# Altium PCB PCB52.PcbDoc
Units mil, origin at the board's own origin, x right, y up, seen from the top; angles counter-clockwise.
Board outline 1390 x 1665 mil, 2 copper layers (Top Layer, Bottom Layer), stack 21 mil thick; 22 components, 15 nets, 85 pads, 10 vias.
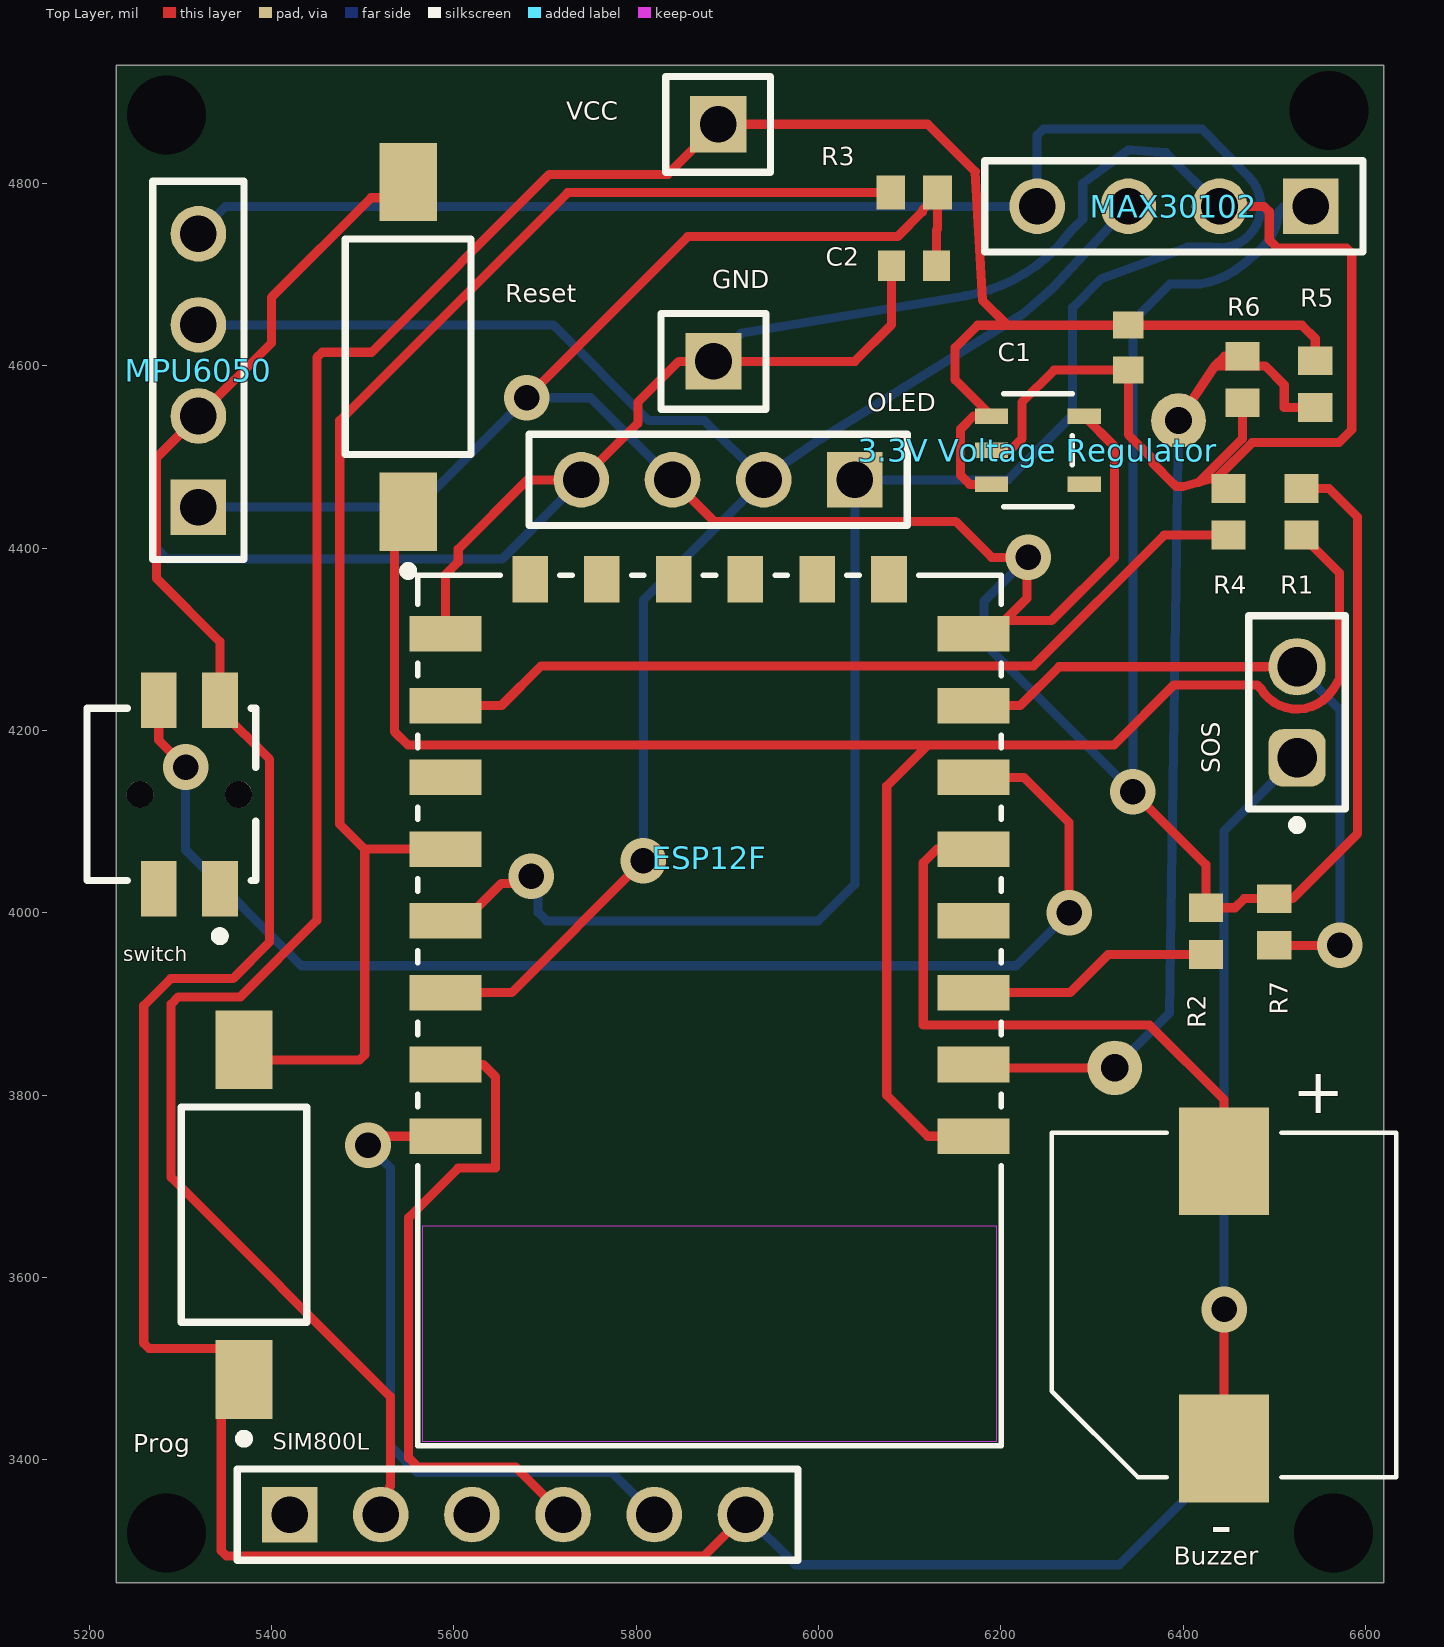
[diagram p0: Top Layer view]
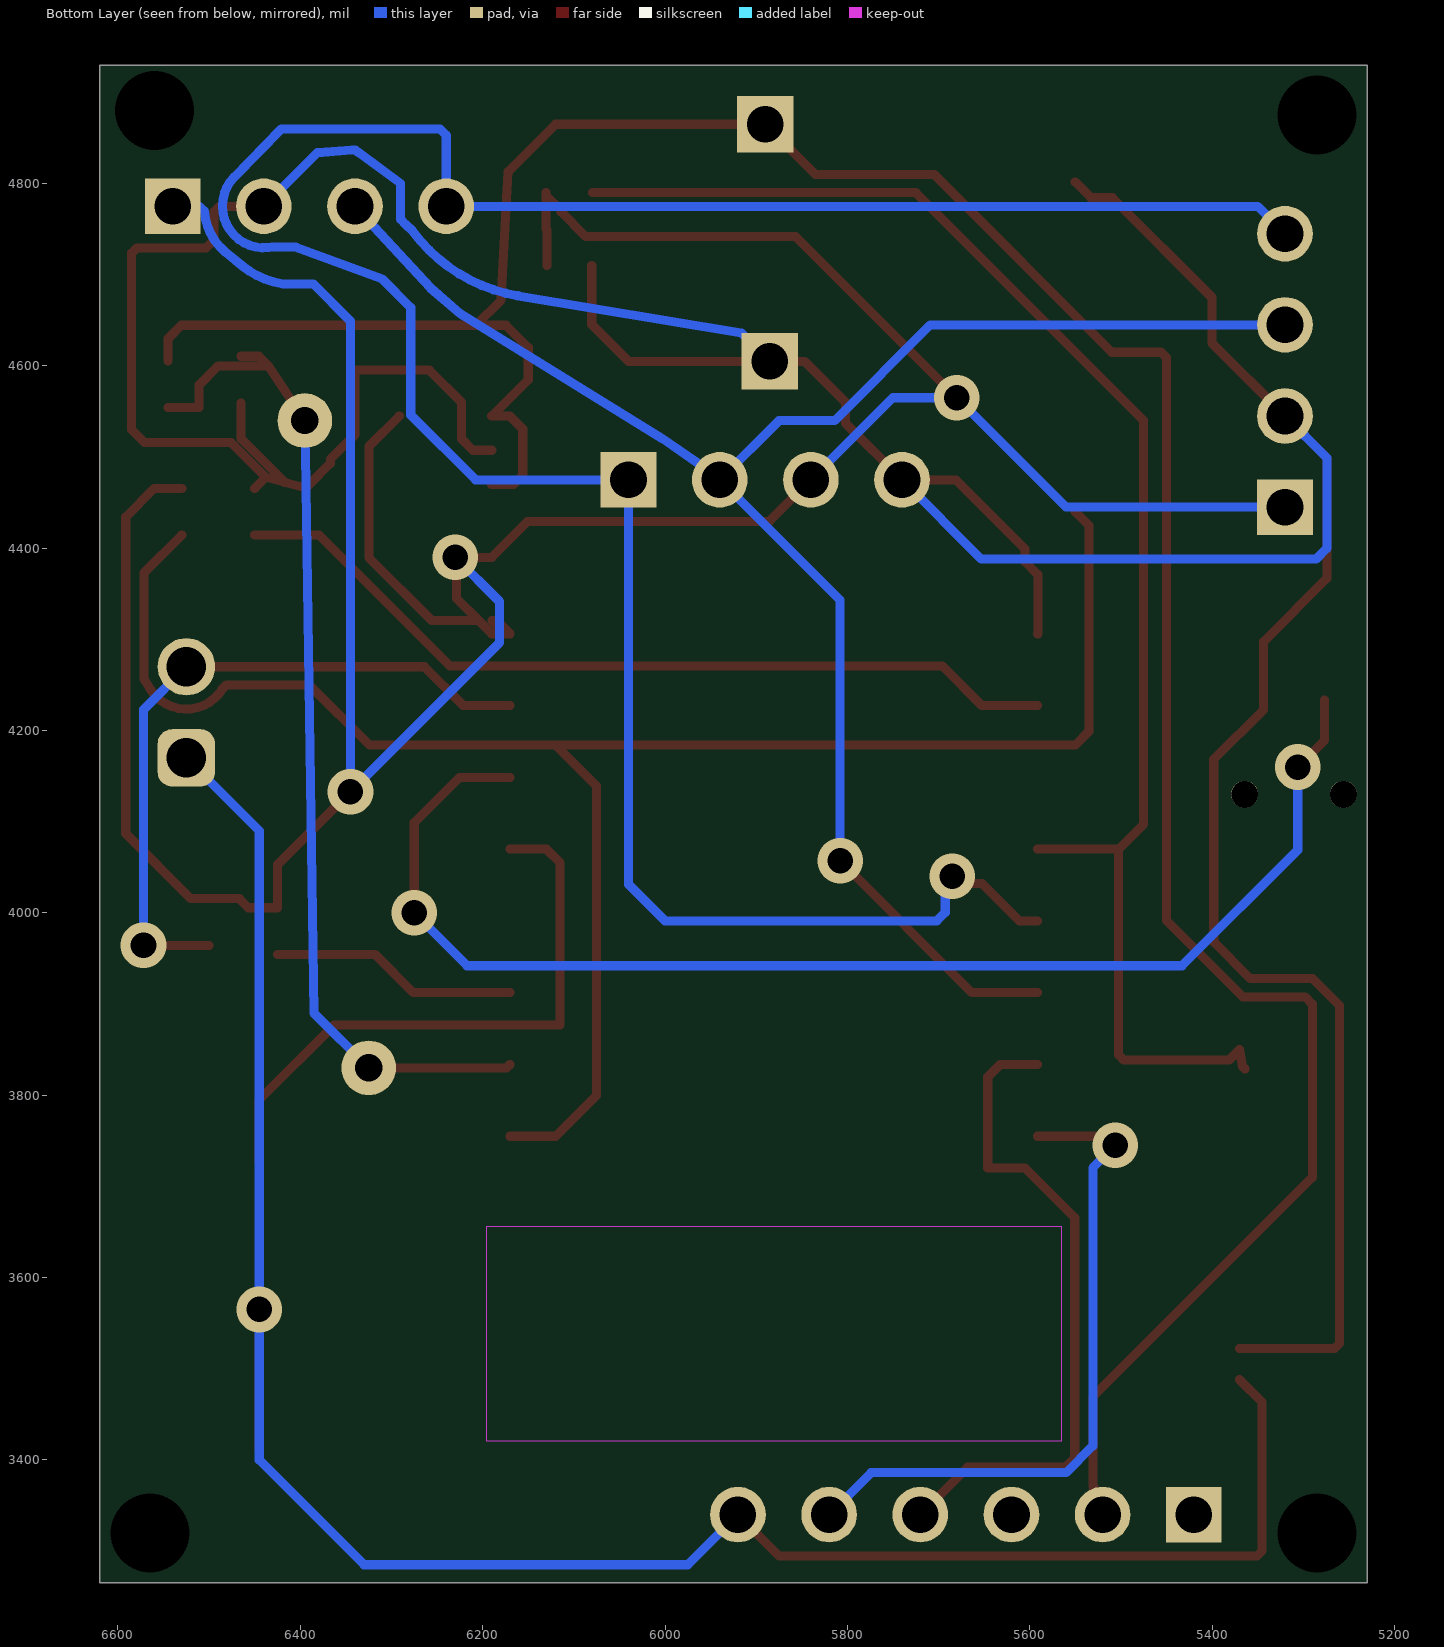
[diagram p1: Bottom Layer view, seen from below]
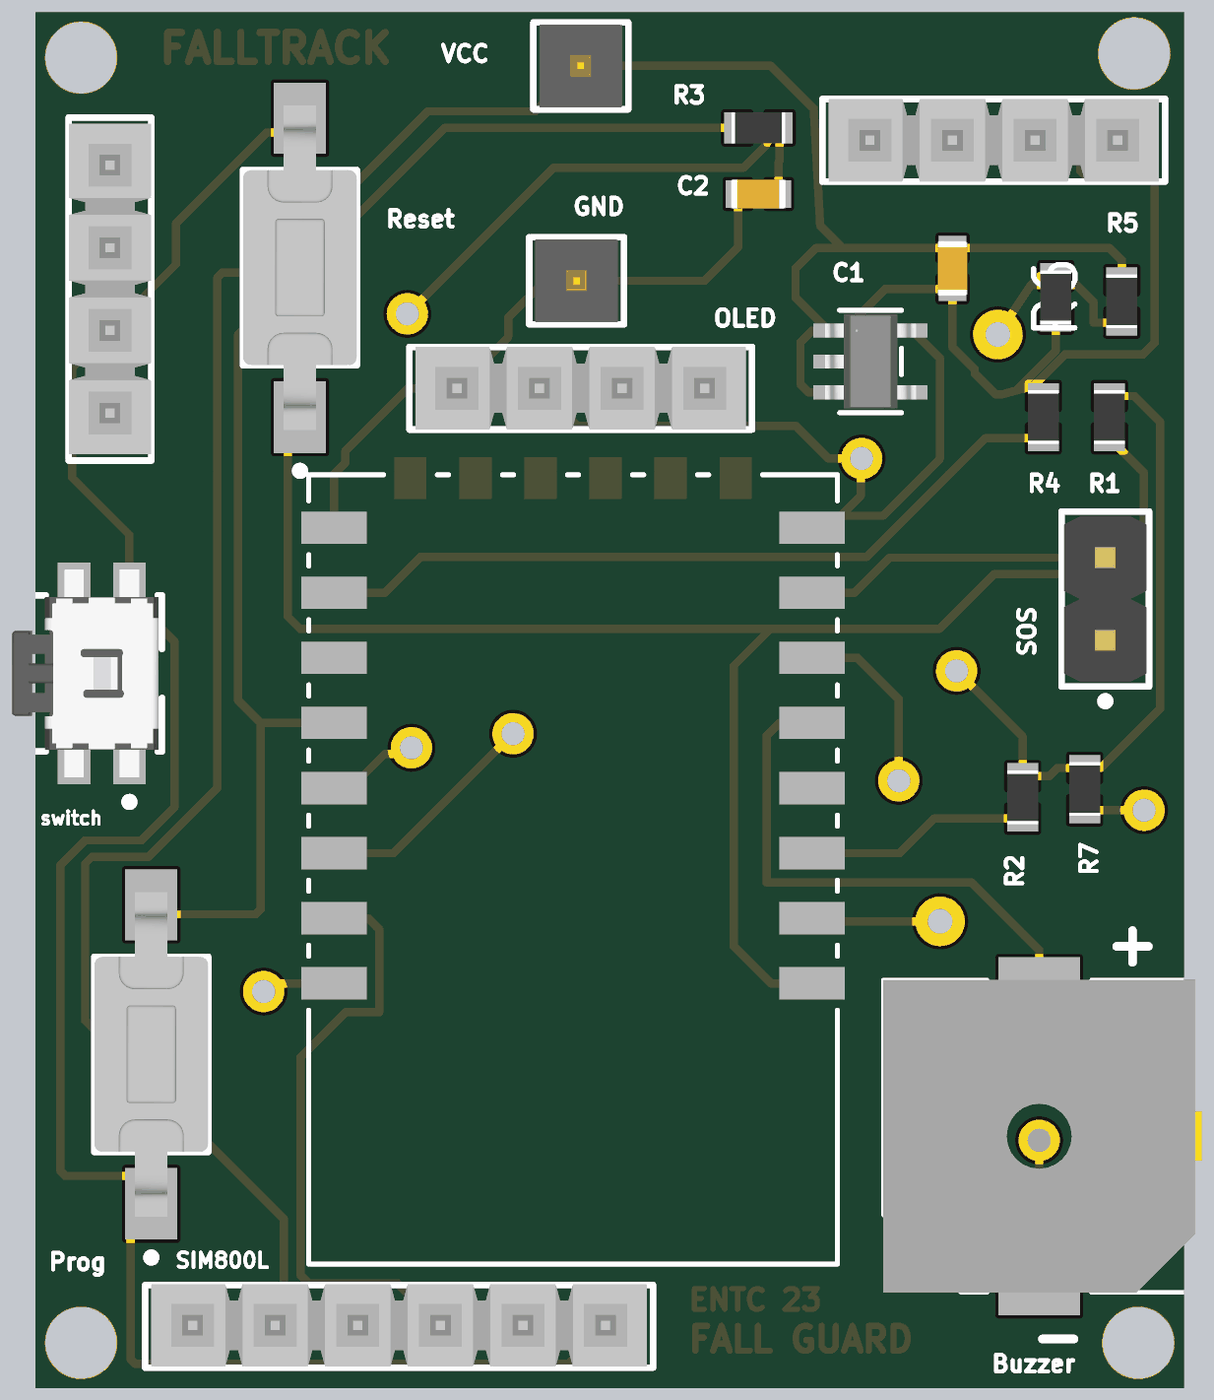
[diagram p2: 3D render of the assembled board from above, using the file's embedded part models]

## Layer stack, top to bottom
Top Solder: solder mask 0.4, Solder Resist, Dk 3.5
Top Layer: signal copper 1.4
Dielectric 2: prepreg 2.8, PP-006, Dk 4.1
Dielectric 1: dielectric 12.6, FR-4, Dk 4.8
Dielectric 3: prepreg 2.8, PP-006, Dk 4.1
Bottom Layer: signal copper 1.4
Bottom Solder: solder mask 0.4, Solder Resist, Dk 3.5

## Board outline
5230,3265 5230,4930 6620,4930 6620,3265

## Design rules (kind name [scope] priority, off if disabled: settings)
Clearance [All] p1: gap=10 ignorepadtopadclearanceinfootprint=FALSE
PolygonConnect [All] p1: connectstyle=Relief reliefconductorwidth=10 reliefentries=4 polygonreliefangle="90 Angle" airgapwidth=10
RoutingVias [All] p1: holewidth=28 width=50 viastyle="Through Hole" minholewidth=28 minwidth=50 maxholewidth=28 maxwidth=50
SolderMaskExpansion [All] p1: expansion=4 istentingtop=FALSE
SupplyNets "Schematic Supply Nets_2" [InNet('GND')] p1: voltage=0.000
Width [All] p1: maxlimit=10 minlimit=10 preferedwidth=10
30 further rules are at their usual default settings.

## Components (designator, comment, footprint, x,y, rotation, side; value= is the part's Value field where it differs from the comment)
"3.3V Voltage Regulator" "XC6219B332MR" SOT-25_TOR 6240.75,4507.4 r0 top
Buzzer "CMI-9653S-SMT" CUI_CMI-9653S-SMT 6445,3570 r0 top
C1 "1µF" CAPC1608X90X35LL10T15 6340,4620 r270 top
C2 "1µF" CAPC1608X90X35LL10T15 6105,4710 r180 top
ESP12F "ESP-12FESP8266MOD" ESP-12FESP8266MOD_AIT 5880.63,3892.8 r180 top
GND "TSW-101-07-L-S" FP-TSW-101-07-L-S-MFG 5885,4605 r0 top
MAX30102 "TSW-104-08-G-S" SMTC-TSW-104-08-X-S 6540,4775 r180 top
MPU6050 "TSW-104-08-G-S" SMTC-TSW-104-08-X-S 5320,4445 r90 top
OLED "TSW-104-08-G-S" SMTC-TSW-104-08-X-S 6040,4475 r180 top
Prog "FSMSMTR" TECO-FSMSMTR_V 5370,3669.09 r90 top (schematic designator Programming)
R1 "10k" RESC1609X50X30NL8T20 6530,4440 r270 top
R2 "10k" RESC1609X50X30NL8T20 6425,3980 r270 top
R3 "10k" RESC1609X50X30NL8T20 6105,4790 r0 top
R4 "10k" RESC1609X50X30NL8T20 6450,4440 r90 top
R5 "100k" RESC1609X50X30NL8T20 6545,4580 r90 top
R6 "100k" RESC1609X50X30NL8T20 6465,4585 r270 top
R7 "10k" RESC1609X50X30NL8T20 6500,3990 r270 top
Reset "FSMSMTR" TECO-FSMSMTR_V 5550,4620.91 r90 top
SIM800L "TSW-106-07-F-S" SMTC-TSW-106-07-X-S 5420,3340 r0 top
SOS "61300211121" 61300211121 6525,4220 r90 top
switch "EVQ-PUC02K" FP-EVQ-PUC02K-MFG 5310,4130 r270 top (schematic designator wifi)
VCC "TSW-101-07-L-S" FP-TSW-101-07-L-S-MFG 5890,4865 r0 top

## Footprints (in the part's own frame and the unit in brackets; to place one, negate y for a bottom-side part, rotate by r counter-clockwise, add the part's x,y. Pads: shape width x height; smd on the part's side, far side on the other; paste and mask are expansions set on the pad)
61300211121 [mm] "Pin Header, pitch 2.54 mm, THT, Vertical, single row, 2p"
  rrect50% 1.6x1.6 hole 1.1: 1(-1.27,0)
  round 1.6 hole 1.1: 2(1.27,0)
  silkscreen extent -3.26,-1.34 2.69,1.34, body extent -2.54,-1.27 2.54,1.27, height 8.57
CAPC1608X90X35LL10T15 [mm] "Chip Capacitor, 2-Leads, Body 1.7x0.9mm, IPC High Density"
  rect 0.75x0.85 smd: 1(-0.625,0) 2(0.625,0)
  body extent -0.85,-0.45 0.85,0.45, height 0.9
CUI_CMI-9653S-SMT [mm]
  rect 2.5x3 smd: N(0,-4) P(0,4)
  silkscreen extent -4.8,-4.8 4.8,4.8, body extent -5,-4.8 5,4.8, height 0.25
ESP-12FESP8266MOD_AIT [mil]
  rect 79x39 smd paste+0 mask+0: 1(-289.37,137.8) 2(-289.37,59.06) 3(-289.37,-19.68) 4(-289.37,-98.42) 5(-289.37,-177.16) 6(-289.37,-255.9) 7(-289.37,-334.65) 8(-289.37,-413.39) 15(289.37,-413.39) 16(289.37,-334.65) 17(289.37,-255.9) 18(289.37,-177.16) 19(289.37,-98.42) 20(289.37,-19.68) 21(289.37,59.06) 22(289.37,137.8)
  rect 39x51 smd paste-25.5 mask-25.5: 9(-196.85,-473.42) 10(-118.11,-473.42) 11(-39.37,-473.42) 12(39.37,-473.42) 13(118.11,-473.42) 14(196.85,-473.42)
  Keep-Out Layer region: 315,472.5 -315,472.5 -315,236.5 315,236.5
  silkscreen extent -320,-478 320,477
FP-EVQ-PUC02K-MFG [mm]
  rect 1.55x1 smd paste+0 mask+0: 1(2.625,0.85) 2(2.625,-0.85) 3(-2.625,0.85) 4(-2.625,-0.85)
  round 0.75 hole 0.75 unplated paste-2539.97 mask+0: ""(0,1.375) ""(0,-1.375)
  silkscreen extent -2.4,-2.85 4.07,1.85, body extent -3.5,-2.95 3.5,1.95, height 0.25
FP-TSW-101-07-L-S-MFG [mm]
  rect 1.57x1.57 hole 1.02 paste-2539.97 mask+0: 1(0,0)
  silkscreen extent -1.46,-1.34 1.46,1.34, body extent -1.56,-1.44 1.56,1.44, height 0.25
RESC1609X50X30NL8T20 [mm] "Chip Resistor, 2-Leads, Body 1.65x0.95mm, IPC Medium Density"
  rect 0.8x0.95 smd: 1(-0.65,0) 2(0.65,0)
  body extent -0.82,-0.48 0.82,0.48, height 0.5
SMTC-TSW-104-08-X-S [mm] ".025 SQ Post Terminal Strip Assembly, 1x4 Pins, Vertical, 2.54mm Pitch, Male"
  rect 1.55x1.55 hole 1.02: 1(0,0)
  round 1.55 hole 1.02: 2(2.54,0) 3(5.08,0) 4(7.62,0)
  silkscreen extent -1.46,-1.27 9.08,1.27, body extent -1.27,-1.27 8.89,1.27, height 8.38
SMTC-TSW-106-07-X-S [mm] ".025 SQ Post Terminal Strip Assembly, 1x6 Pins, Vertical, 2.54mm Pitch, Male"
  rect 1.55x1.55 hole 1.02: 1(0,0)
  round 1.55 hole 1.02: 2(2.54,0) 3(5.08,0) 4(7.62,0) 5(10.16,0) 6(12.7,0)
  silkscreen extent -1.46,-1.27 14.16,1.27, body extent -1.27,-1.24 13.97,1.3, height 8.38
SOT-25_TOR [mil]
  rect 36.5x17 smd paste+0 mask+0: 1(-50.75,37.4) 2(-50.75,0) 3(-50.75,-37.4) 4(50.75,-37.4) 5(50.75,37.4)
  silkscreen extent -38,-62 38,62, body extent -55,-57 55,57, height 51
TECO-FSMSMTR_V [mm] "SMD, 2-Leads, Body 6x3.5mm, Pitch 9.19mm"
  rect 2.2x1.6 smd: 1(-4.595,0)
  rect 2.18x1.6 smd: 2(4.595,0)
  silkscreen extent -6.37,-1.75 3,1.75, body extent -4.98,-1.75 4.98,1.75, height 4.4

## Part data
"3.3V Voltage Regulator": "No Description Available", Mfr_Name="Torex Semiconductor", RefDes=RefDes, Type=Type
Buzzer: "9.6 mm, 3 Vdc, 80 dB, 2.7 kHz, Surface Mount (SMT), Driving Circuit, Magnetic Audio Indicator Buzzer", Package=None, Check_prices=https://www.snapeda.com/parts/CMI-9653S-SMT-TR/Same+Sky/view-part/?ref=eda, MF="Same Sky", MP=CMI-9653S-SMT-TR, SnapEDA_Link=https://www.snapeda.com/parts/CMI-9653S-SMT-TR/Same+Sky/view-part/?ref=snap
C1 C2: library part CMP-2000-06336-1, "Chip Capacitor, 1 uF, +/- 10%, 10 V, -55 to 85 degC, 0603 (1608 Metric), RoHS, Tape and Reel", Capacitance=1uF, Capacitance - nF=1000nF, Case Code - in=0603, Case Code - mm=1608, Case Height=0.8mm, Case Length=1.6mm, Dielectric=X5R, Manufacturer=Murata, Maximum Operating Temperature=+85C, Minimum Operating Temperature=-55C, Operating Temperature Range=-55Cto+85C, Package / Case=0603(1608metric), Package Description="2-Pin Surface Mount Device, Body 1.6 x 0.8 mm", Temperature Coefficient / Code=+/-15%, Tolerance=10%, Voltage Rating=10V, Brand=MurataElectronics, Case Width=0.8mm, Datasheet URL=http://search.murata.co.jp/Ceramy/image/img/A01X/G101/ENG/GRM188R61A105KA61-01.pdf, Datasheet Version=02/2016, Dimensions=0.8mmWx1.6mmLx0.8mmH, Factory Pack Quantity=4000, Manufacturer URL=http://www.murata.com/, Mounting Technology=SurfaceMount, Package Reference=0603, Packaging=Reel, Product=GeneralTypeMLCCs, Product Category=MultilayerCeramicCapacitorsMLCC-SMD/SMT, RoHS=Details, Series=GRM, Termination Style=SMD/SMT, Type=GeneralPurposeMLCC, Voltage Rating DC=10V
ESP12F: "No Description Available", Mfr_Name=Ai-Thinker, RefDes=RefDes, Type=Type
GND VCC: library part CMP-02766-001775-1, "CONN HEADER VERT 1POS", Color=Black, Flammability Rating="UL94 V-0", Max Current Rating=7.6A, Max Operating Temperature=125°C, Max Voltage Rating (AC)=550V, Min Operating Temperature=-55°C, Connector Type=Header, Contact Finish - Mating=GOLD, Contact Material=Bronze, Contact Mating Length=0.23inch, Contact Plating=Gold, Contact Shape=Square, Contact Type="Male Pin", Depth=2.54mm, Fastening Type=Pull, Gender=Male, Housing Color=Black, Housing Material=Polyester, Insulation Color=Black, Insulation Material=PBT, Lead Free="Lead Free", Length=2.54mm, Mount="Through Hole", Number of Contacts=1, Number of Positions=1, Number of Rows=1, Orientation=Straight, Packaging=Bulk, Radiation Hardening=No, Reach SVHC Compliant=Yes, RoHS Compliant=Yes, Series=TSW, Termination=Solder, Width=2.54mm
MAX30102 MPU6050 OLED: library part CMP-1024-00357-1, "0.025\" SQ Post Header, Through-hole, Vertical, -55 to 125 degC, 2.54 mm Pitch, 4-Pin, Male, RoHS", Manufacturer=Samtec, Temperature Range="-55 to 125 degC", ComponentLink1Description="Manufacturer URL", ComponentLink1URL=http://www.samtec.com, ComponentLink2Description=Datasheet, ComponentLink2URL=http://www.samtec.com/documents/webfiles/pdf/TSW_TH.PDF, ComponentLink3Description="Package Specification", ComponentLink3URL=http://www.samtec.com/documents/webfiles/cpdf/TSW-XXX-XX-XXX-X-XX-XXX-MKT.pdf, DatasheetVersion=F-214, Mounting Technology=Through-hole, Orientation=Vertical, PackageDescription=".025[0.64] SQ. Post Terminal Strip Assembly", PackageReference=TSW-104-08-X-S, PackageVersion="DM, 8/1988", PartNumber=TSW-104-08-G-S, Pitch="2.54 mm", RoHS=True
Prog Reset: library part CMP-2000-07501-1, "FSMSM Push Button Switch, 50 mA, -35 to 85 degC, 2-Pin SMD, RoHS, Tape and Reel", Case\/Package=SMD/SMT, Contact Current Rating=50mA, Contact Resistance=100mOhm, Manufacturer="TE Connectivity", Max Operating Temperature=85degC, Max Voltage Rating (DC)=12V, Min Operating Temperature=-35degC, Operating Force=180gf, Package Description="2-Pin Surface Mount Device, Body 6 x 3.5 mm, Pitch 9.19 mm", Package Quantity=1800, Voltage Rating (DC)=24V, Actuator Length=1.07mm, Actuator Material=Polyamide, Contact Material=Brass, Contact Plating=Silver, Current Rating=50mA, Datasheet URL=http://www.te.com/commerce/DocumentDelivery/DDEController?Action=showdoc&DocId=Customer+Drawing%7F1437566-3%7FC2%7Fpdf%7FEnglish%7FENG_CD_1437566-3_C2_1437566_3_1_c.dwg.pdf%7F1437566-4, Datasheet Version="Rev. C2, 08/2014", Electrical Life=20000Cycles, ELV=Compliant, Illumination Type=Illuminated, Lead Free=LeadFree, Manufacturer URL=http://www.te.com/, Mechanical Life=20000Cycles, Mount=SurfaceMount, Mounting Technology=SurfaceMount, Orientation=Straight, Package Reference=FSMSMTR, Packaging=TapeandReel, REACH SVHC=Unknown, RoHSCompliant=true, Switch Travel=0.25mm, Termination=GullWing, Throw Configuration=SPST
R1 R2 R3 R4 R5 R6 R7: library part CMP-1666-00005-4, "Chip Resistor, 10 KOhm, +/- 1%, 100 mW, -55 to 155 degC, 0603 (1608 Metric), RoHS, Tape and Reel", Manufacturer="Vishay Semiconductor", Max Operating Temperature="155 degC", Min Operating Temperature="-55 degC", Package Quantity=5000, Voltage Rating="75 V", ComponentLink1Description="Manufacturer URL", ComponentLink1URL=http://www.vishay.com/, ComponentLink2Description=Datasheet, ComponentLink2URL=https://datasheet.ciiva.com/11809/0900766b80d98afc-11809037.pdf, DatasheetVersion=06/2012, Height="0.45 mm", Length="1.55 mm", Mounting Technology="Surface Mount", PackageDescription="2-Pin Surface Mount Device, Body 1.575 x 0.85 mm", PackageReference=0603, Packaging="Tape and Reel", REACH SVHC=Unknown, RoHSCompliant=true
SIM800L: library part CMP-1024-00385-1, "0.025\" SQ Post Header, Through-hole, Vertical, -55 to 125 degC, 2.54 mm Pitch, 6-Pin, Male, RoHS", Manufacturer=Samtec, Temperature Range="-55 to 125 degC", ComponentLink1Description="Manufacturer URL", ComponentLink1URL=http://www.samtec.com, ComponentLink2Description=Datasheet, ComponentLink2URL=http://www.samtec.com/documents/webfiles/pdf/TSW_TH.PDF, ComponentLink3Description="Package Specification", ComponentLink3URL=http://www.samtec.com/documents/webfiles/cpdf/TSW-XXX-XX-XXX-X-XX-XXX-MKT.pdf, DatasheetVersion=F-214, Mounting Technology=Through-hole, Orientation=Vertical, PackageDescription=".025[0.64] SQ. Post Terminal Strip Assembly", PackageReference=TSW-106-07-X-S, PackageVersion="DM, 8/1988", PartNumber=TSW-106-07-F-S, Pitch="2.54 mm", RoHS=True
SOS: library part CMP-1712-00002-6, Color=Black, Contact Resistance=20mΩ, Current Rating=3A, Max Operating Temperature=125°C, Min Operating Temperature=-40°C, Operating Supply Voltage=250V, Connector Type="Male Pin", Contact Gender=Male, Contact Material=Copper, Contact Mating Length=5.9944mm, Contact Plating=Gold, Gender=Male, Height=8.94mm, Housing Material=PBT, Lead Free="Lead Free", Lead Pitch=2.54mm, Mount="Through Hole", NexarPartId=20081794, Number of Contacts=2, Number of Pins=2, Number of Positions=2, Number of Rows=1, Orientation=Vertical, Packaging=Bulk, Pitch=2.54mm, REACH SVHC="No SVHC", RoHS=Compliant, Termination="Through Hole", Voltage Rating=250V
switch: library part CMP-05618-000046-1, "SWITCH TACTILE SPST-NO 0.05A 12V", Actuator Color=Black, Contact Current Rating=50mA, Contact Resistance=500mR, Max Operating Temperature=70°C, Max Voltage Rating (DC)=12V, Min Operating Temperature=-40°C, Operating Force=2.2N, Package Quantity=1, Actuator Length=1mm, Contact Plating=Silver, Current Rating=50mA, Depth=4.5mm, Electrical Life=100000Cycles, Height=1.65mm, Illumination Type=Non-Illuminated, Lead Free="Lead Free", Length=6.4mm, Max Current Rating=50mA, Mechanical Life=100000Cycles, Mount="Surface Mount", Orientation=Straight, Packaging="Tape and Reel", Radiation Hardening=No, RoHS Compliant=Yes, Series=EVQPU, Size=3.5mm, Switch Function=Off-Mom, Switch Travel=0.3mm, Termination="Gull Wing", Throw Configuration=SPST, Voltage Rating (DC)=12V, Width=3.5mm

## Free pads (board coordinates)
  round 60 hole 30: 2(6325,3830) 3(6395,4540)
  round 60 hole 86.6: MH(5285,3320) MH(5285,4875) MH(6560,4880) MH(6565,3320)

## Via types
v1: diameter 50, hole 28, Top Layer to Bottom Layer, 10 vias

## Nets (pads, with @x,y where several pads share a name; then routed paths per layer and width w, separated by ;. In a path a pad name is that pad's centre, name@x,y a point inside that pad or via, vN(x,y) a via of type N, cw(c..) or ccw(c..) an arc to the next point about the centre after c; other vN are vias at no path point)
3.3V: "3.3V Voltage Regulator.5" C2.1 ESP12F.8 MAX30102.1 MPU6050.1 OLED.3 R1.1 R2.1 R3.2 R7.1 | length 4044.9
  Top Layer w10: v1(5680,4565) 5856.73,4741.73 6086.8,4741.73 6114.02,4768.95 6114.02,4770.47 6130.59,4787.05 R3.2 6130.59,4749.98 6129.61,4749 C2.1 ; OLED.3 5885.51,4429.49 6150.51,4429.49 6190,4390 v1(6230,4390) 6228.82,4388.82 6228.82,4345 ESP12F.8@6204.5,4320.68 ; 6291.5,4544.8 6324.75,4511.55 6324.75,4389.75 6255.68,4320.68 ESP12F.8@6204.5,4320.68 ; v1(6345,4133) 6425,4053 R2.1 6457,4005.59 6467,4015.59 R7.1 6520,4015.59 6591.5,4087.09 6591.5,4434.1 6560,4465.59 R1.1 ; ESP12F.8 6190,4306.18 ESP12F.8@6204.5,4320.68 ; ESP12F.8 6184.5,4320.68 6189.82,4320.68 6175.32,4306.18 ESP12F.8
  Bottom Layer w10: MPU6050.1 5560,4445 v1(5680,4565) 5750,4565 OLED.3 ; v1(6230,4390) 6181.5,4341.5 6181.5,4296.5 v1(6345,4133) 6345,4649.14 6385.86,4690 6419.06,4690 ccw(c6404.89,4782.76) 6464.56,4710.34 6481.66,4724.44 ccw(c6440,4775) 6505.29,4769.58 6510.7,4775 MAX30102.1
3.7V: "3.3V Voltage Regulator.1" "3.3V Voltage Regulator.3" C1.1 R5.2 SIM800L.2 VCC.1 | length 3165.2
  Top Layer w10: SIM800L.2 5529.76,3349.76 5529.76,3370.5 5530.63,3371.37 5530.63,3469.37 5290,3710 5290,3900 5297.91,3907.91 5366.2,3907.91 5450,3991.72 5450,4609.14 5455.86,4615 5510,4615 5705,4810 5835,4810 VCC.1 6120,4865 6172,4813 6179.82,4672.18 6207.4,4644.61 ; 6190,4470 6166,4470 6156,4480 6156,4530.8 6170,4544.8 6187,4544.8 6190,4544.8 6150,4584.8 6150,4620 6174.61,4644.61 6207.4,4644.61 ; R5.2 6545,4630 6530.39,4644.61 C1.1 6207.4,4644.61
A1: ESP12F.20 MAX30102.3 MPU6050.3 OLED.2 | length 1943
  Top Layer w10: ESP12F.20 5663.48,3912.48 v1(5808,4057)
  Bottom Layer w10: MPU6050.3 5709,4645 5814,4540 5875,4540 OLED.2 ; v1(5808,4057) 5808,4343 OLED.2 ; MAX30102.3 6257.31,4685.53 6256.91,4685.13 6224.88,4657.44 6003.27,4520.51 5945.86,4480.86 OLED.2
A2: ESP12F.19 MAX30102.4 MPU6050.4 OLED.1 | length 2909.6
  Top Layer w10: ESP12F.19 5611.26,3991.22 5652.39,4032.35 5677.35,4032.35 v1(5685,4040)
  Bottom Layer w10: MPU6050.4 5350,4775 MAX30102.4 6240,4853 6247,4860 6420.59,4860 6472.53,4806.82 cw(c6440,4775) 6434.75,4729.79 6430.9,4730.24 6406.76,4730.24 6404.98,4730.24 6310.43,4695.43 6278.85,4663.85 6278.85,4546.15 6207.7,4475 OLED.1 6040,4031.22 6000,3991.22 5702,3991.22 5692.65,4000.57 5692.65,4032.35 v1(5685,4040)
GND: "3.3V Voltage Regulator.2" Buzzer.N C1.2 C2.2 ESP12F.15 GND.1 MAX30102.2 MPU6050.2 OLED.4 Prog.1 R4.2 R6.2 Reset.2 SIM800L.6 SOS.1 switch.3 | length 7186.7
  Top Layer w10: Prog.1 5345,3463.19 5345,3300.35 5350.86,3294.49 5874.49,3294.49 SIM800L.6 ; Prog.1@5370,3522.05 5265.86,3522.05 5260,3527.91 5260,3898.28 5289.63,3927.91 5357.91,3927.91 5398.15,3968.15 5398.15,4168.31 5343.46,4223 switch.3 5343.46,4297.54 5274,4367 5274,4499 MPU6050.2 5400,4625 5400,4675 5509.36,4784.36 5532.55,4784.36 Reset.2 ; ESP12F.15 5591,4306.18 5591,4371 5605,4385 5605,4399 5681,4475 OLED.4 5802,4537 5802,4560 5847,4605 GND.1 6040,4605 6080.39,4645.39 C2.2 ; 6190,4507.4 6210.65,4507.4 6223.25,4520 6223.25,4560 6258.64,4595.39 C1.2 6340,4524.59 6367,4497.59 6367,4493 6389.91,4470.09 6392.5,4467.5 6399.58,4467.5 6417.27,4472.27 ; MAX30102.2 6488.63,4775 6494.49,4769.14 6494.49,4738.27 6503.27,4729.49 6579.14,4729.49 6585,4723.63 6585,4530 6570.86,4515.86 6475.86,4515.86 R4.2@6437.8,4477.8 ; Buzzer.N v1(6445,3565) ; R4.2 R4.2@6437.8,4477.8 ; R6.2 6465,4520 6417.27,4472.27 ; 6417.27,4472.27 R4.2@6437.8,4477.8
  Bottom Layer w10: MPU6050.2 5274,4499 5274,4400 5286,4388 5653,4388 OLED.4 ; GND.1 5916.17,4636.17 6161.05,4676.85 ccw(c6131.43,4855.05) 6276.82,4747.85 6284.14,4755 6290,4760.86 6290,4800 6337.12,4834.68 6339.76,4836.63 6343.42,4836.63 6381.23,4833.77 MAX30102.2 ; SIM800L.6 5975,3285 6330,3285 6445,3400 v1(6445,3565) 6445,4090 SOS.1
NetBuzzer_P: Buzzer.P ESP12F.5 | length 670.7
  Top Layer w10: ESP12F.5 6130,4069.96 6115,4054.96 6115,3877 6363,3877 6445,3795 Buzzer.P
NetESP12F_1: ESP12F.1 R1.2 Reset.1 | length 2032.1
  Top Layer w10: Reset.1 5535,4425 5535,4199 5550,4184 6120,4184 ; ESP12F.1 6120,3755 6075,3800 6075,4139 6120,4184 ; R1.2 6571.5,4372.91 6571.5,4256.6 6564.7,4245.64 6563.13,4243.39 cw(c6525,4270) 6485.04,4246.23 6484.2,4247.07 6481.27,4250 6390,4250 6324,4184 6120,4184
NetESP12F_2: ESP12F.2 pad.2 pad.3 R5.1 R6.1 | length 1141.3
  Top Layer w10: ESP12F.2 6173.74,3830 pad.2 ; pad.3 6435,4600 ; R6.1 6445.59,4610.59 6435,4600 ; R5.1 6511,4554.41 6511,4579 6490,4600 6465,4600 6435,4600
  Bottom Layer w10: pad.2 6385,3890 pad.3
NetESP12F_3: ESP12F.3 R2.2 | length 272.4
  Top Layer w10: ESP12F.3 6276,3912.48 6317.93,3954.41 R2.2
NetESP12F_6: ESP12F.6 switch.4 | length 1446.8
  Top Layer w10: switch.4 5276.53,4189.47 v1(5306,4160) ; ESP12F.6 6225.3,4148.7 6275,4099 v1(6275,4000)
  Bottom Layer w10: v1(5306,4160) 5306,4069 5433,3942 6217,3942 v1(6275,4000)
NetESP12F_7: ESP12F.7 R7.2 SOS.2 | length 769.7
  Top Layer w10: ESP12F.7 6221.44,4227.44 6264,4270 SOS.2 ; R7.2 v1(6572,3964.41)
  Bottom Layer w10: SOS.2 6572,4223 v1(6572,3964.41)
NetESP12F_16: ESP12F.16 R4.1 | length 936.2
  Top Layer w10: ESP12F.16 5652.44,4227.44 5696,4271 6236,4271 6379.41,4414.41 R4.1
NetESP12F_18: ESP12F.18 Prog.2 R3.1 | length 1666
  Top Layer w10: Prog.2@5363.78,3828.78 5366.55,3831.55 Prog.2 5381.43,3838.57 5496.62,3838.57 5502.48,3844.43 5502.48,4069.96 ; ESP12F.18 5502.48,4069.96 ; R3.1 5725,4790 5475,4540 5475,4097.44 5502.48,4069.96
RX: ESP12F.21 SIM800L.4 | length 736.9
  Top Layer w10: ESP12F.21 5632.26,3833.74 5646,3820 5646,3720 5605,3720 5550.63,3665.63 5550.63,3402.23 5560.86,3392 5668,3392 SIM800L.4
TX: ESP12F.22 SIM800L.5 | length 749.8
  Top Layer w10: v1(5506,3745) 5516,3755 ESP12F.22
  Bottom Layer w10: v1(5506,3745) 5530.63,3720.37 5530.63,3415.37 5560,3386 5774,3386 SIM800L.5
pads on no net: "3.3V Voltage Regulator.4" ESP12F.4 ESP12F.9 ESP12F.10 ESP12F.11 ESP12F.12 ESP12F.13 ESP12F.14 ESP12F.17 SIM800L.1 SIM800L.3 switch. switch.1 switch.2

## Other copper
Multi-Layer:
  text "FALLTRACK" at 5375,4870 h35
  text "ENTC 23" at 6015,3360 h25
  text "FALL GUARD" at 6015,3310 h30

## Text inside footprints (layer, text, board x,y; h text height)
"3.3V Voltage Regulator": Mechanical 13 "*" at 6205.75,4513.8 h50
Buzzer: Top Overlay "-" at 6430,3305 h50.21; Top Overlay "+" at 6520,3780 h50.21